# Altium PCB usb_hub.PcbDoc
Units mil, origin at the board's own origin, x right, y up, seen from the top; angles counter-clockwise.
Board outline 2795.28 x 1574.8 mil, 2 copper layers (Top Layer, Bottom Layer), stack 65.792 mil thick; 40 components, 27 nets, 133 pads, 14 vias.
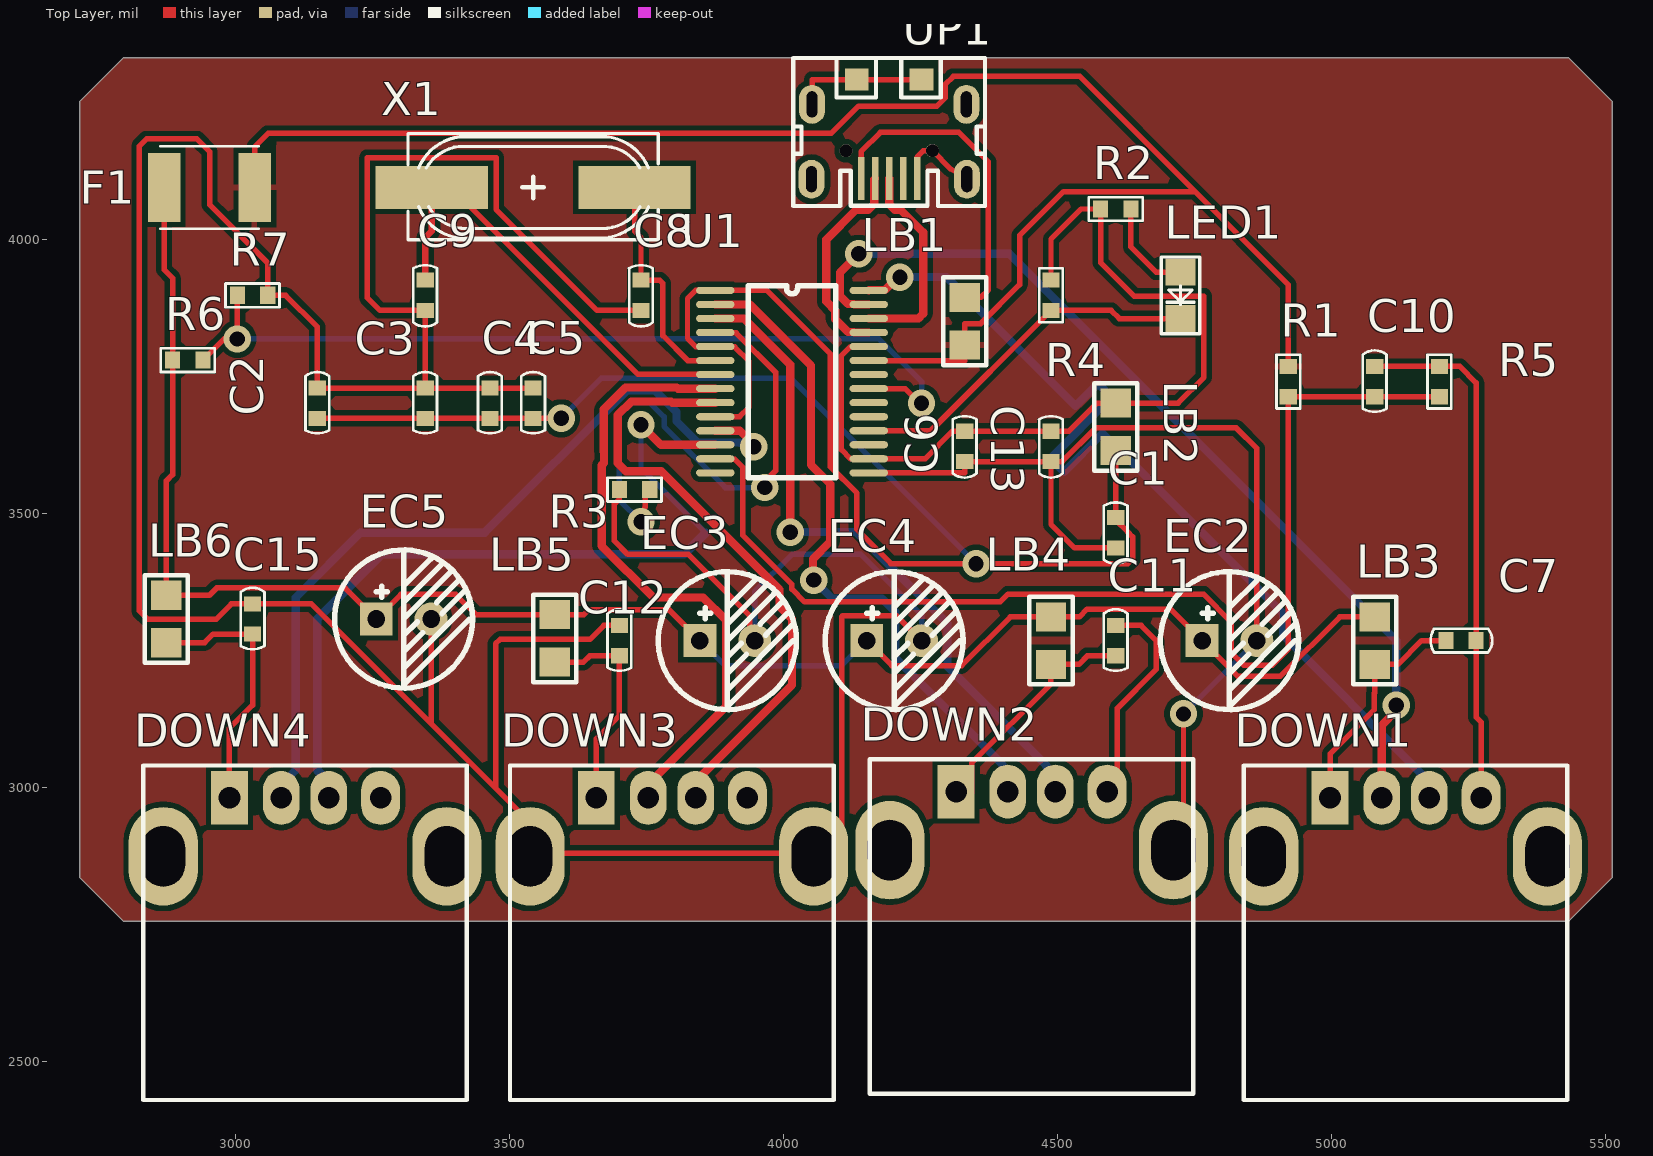
[diagram p0: Top Layer view]
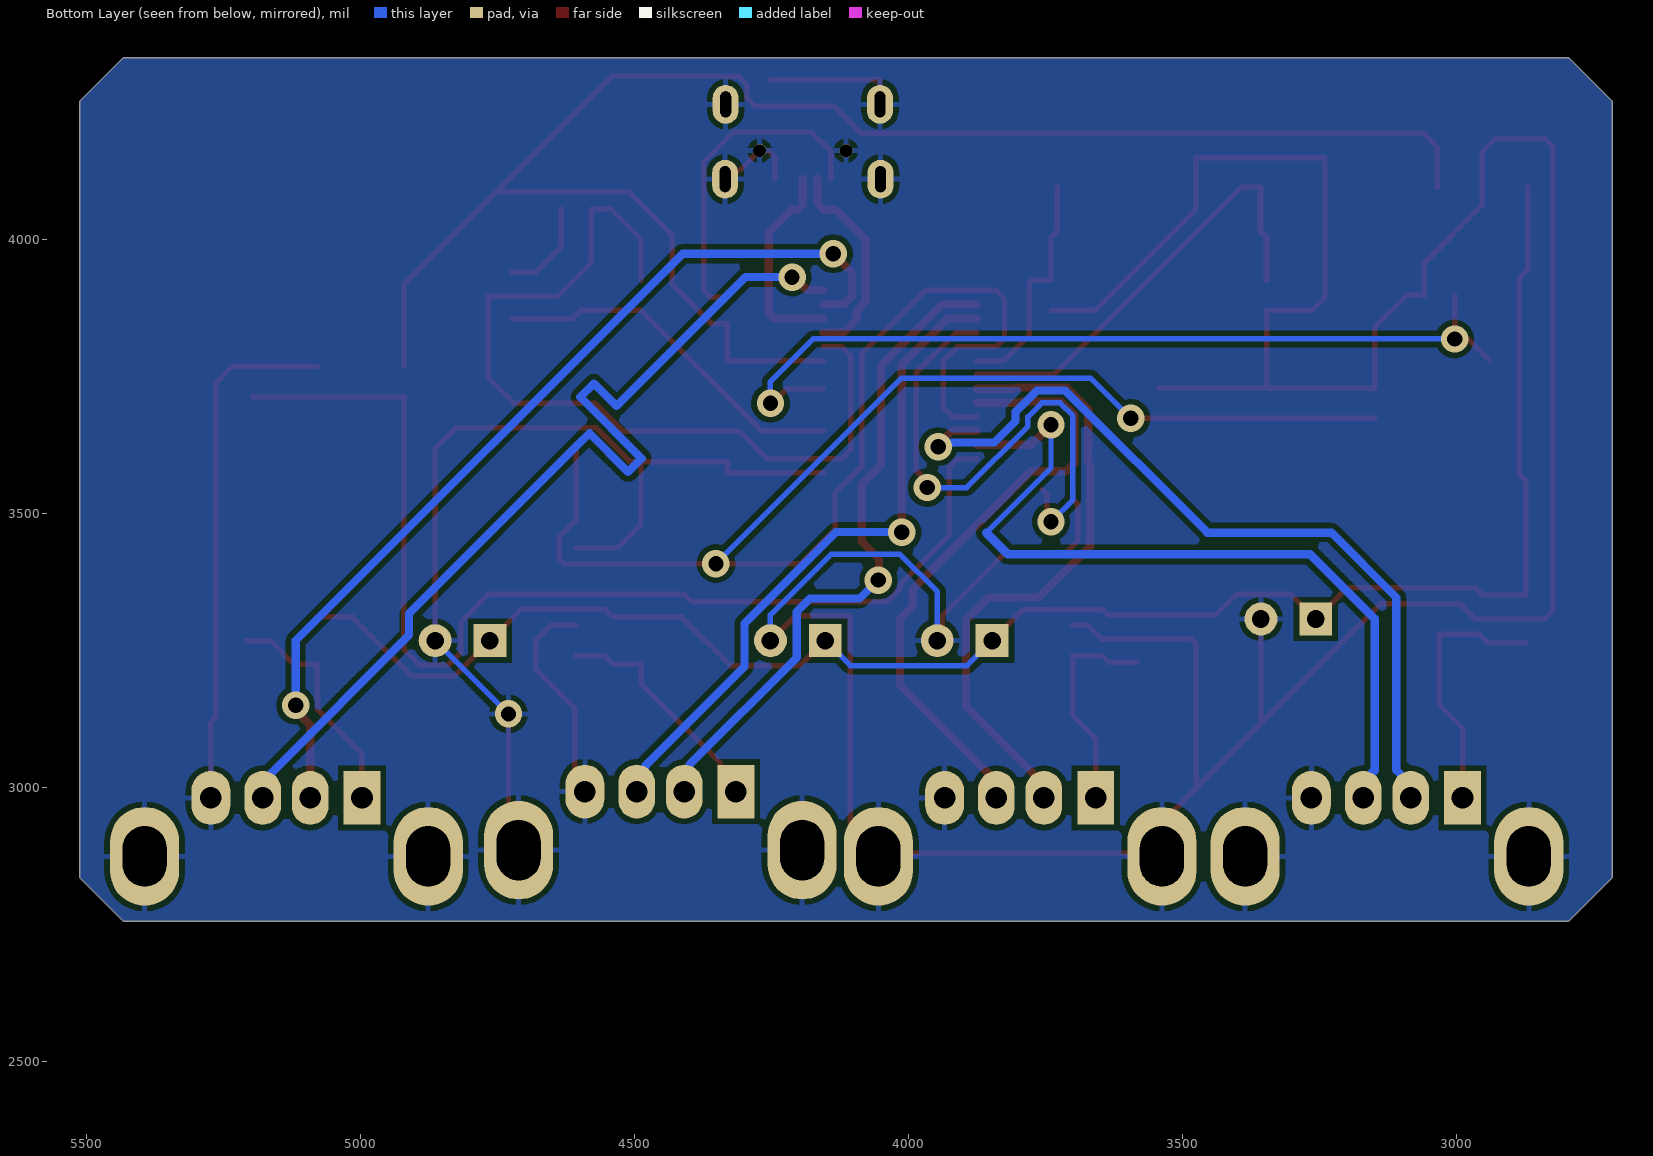
[diagram p1: Bottom Layer view, seen from below]

## Layer stack, top to bottom
Top Solder: solder mask 0.4, Solder Resist, Dk 3.5
Top Layer: signal copper 1.4
Dielectric 1: dielectric 62.992, FR-4, Dk 4.8
Bottom Layer: signal copper 1.4
Bottom Solder: solder mask 0.4, Solder Resist, Dk 3.5

## Board outline
2795.28,2755.91 2716.54,2834.65 2716.54,4251.97 2795.28,4330.71 5433.07,4330.71 5511.81,4251.97 5511.81,2834.65 5433.07,2755.91

## Design rules (kind name [scope] priority, off if disabled: settings)
AssemblyTestPointUsage [All] p1: isadvanced=TRUE
AssemblyTestpoint [All] p1: isadvanced=TRUE testpointundercomponent=TRUE minsize=40 maxsize=100 preferedsize=60 minholesize=0 maxholesize=40 preferedholesize=32 testpointgrid=1 usegrid=TRUE gridtolerance=0.01 allowsidetop=TRUE allowsidebottom=TRUE
Clearance Clearance_1 [OnMid vs OnMid] p1: gap=10 ignorepadtopadclearanceinfootprint=FALSE sourcerule=41 cellrowname=All cellrowtype=0 cellcolname=All cellcoltype=0 innerlayers=TRUE
Clearance Clearance_2 [(ExistsOnLayer('Top Layer') Or ExistsOnLayer('Bottom Layer')) vs (ExistsOnLayer('Top Layer') Or ExistsOnLayer('Bottom Layer'))] p2: gap=10 ignorepadtopadclearanceinfootprint=FALSE sourcerule=41 cellrowname=All cellrowtype=0 cellcolname=All cellcoltype=0 outerlayers=TRUE
Clearance [All] p3: gap=10 ignorepadtopadclearanceinfootprint=FALSE ismatrix=TRUE
ComponentClearance [All] p1: isadvanced=TRUE gap=10 collisioncheckmode=3 verticalgap=10 showdistances=FALSE
DiffPairsRouting [All] p1: maxlimit=10 minlimit=10 mostfreqgap=10 toplayer_minwidth=15 toplayer_maxwidth=15 toplayer_prefwidth=15 bottomlayer_minwidth=15 bottomlayer_maxwidth=15 bottomlayer_prefwidth=15 maxuncoupledlength=500
FabricationTestPointUsage [All] p1: isadvanced=TRUE valid=0 allowmultiple=FALSE
FabricationTestpoint [All] p1: isadvanced=TRUE side=3 testpointundercomponent=TRUE minsize=40 maxsize=100 preferedsize=60 minholesize=0 maxholesize=40 preferedholesize=32 testpointgrid=1 allowsidetop=TRUE allowsidebottom=TRUE usegrid=TRUE gridtolerance=0.01
FanoutControl Fanout_BGA [IsBGA] p1: isadvanced=TRUE bgadir=Out bgaviamode=Centered fanoutstyle=Auto fanoutdirection=Alternating viagrid=1 // Fanout_BGA (Default Rule)
FanoutControl Fanout_LCC [IsLCC] p2: isadvanced=TRUE bgadir=Out bgaviamode=Centered fanoutstyle=Auto fanoutdirection=Alternating viagrid=1 // Fanout_LCC (Default Rule)
FanoutControl Fanout_SOIC [IsSOIC] p3: isadvanced=TRUE bgadir=Out bgaviamode=Centered fanoutstyle=Auto fanoutdirection=Alternating viagrid=1 // Fanout_SOIC (Default Rule)
FanoutControl Fanout_Small [(CompPinCount < 5)] p4: isadvanced=TRUE bgadir=Out bgaviamode=Centered fanoutstyle=Auto fanoutdirection=OutThenIn viagrid=1 // Fanout_Small (Default Rule)
FanoutControl Fanout_Default [All] p5: isadvanced=TRUE bgadir=Out bgaviamode=Centered fanoutstyle=Auto fanoutdirection=Alternating viagrid=1 // Fanout_Default (Default Rule)
Height [All] p1: isadvanced=TRUE minheight=0 maxheight=1000 prefheight=500
HoleSize [All] p1: isadvanced=TRUE absolutevalues=TRUE maxlimit=150 minlimit=1 maxpercent=80.000 minpercent=20.000
HoleToHoleClearance [All] p1: isadvanced=TRUE gap=10 allowstackedmicrovias=TRUE
LayerPairs [All] p1: isadvanced=TRUE enforce=TRUE
MinimumSolderMaskSliver [All] p1: isadvanced=TRUE minsoldermaskwidth=2
NetAntennae [All] p1: isadvanced=TRUE netantennaetolerance=0
PasteMaskExpansion [All] p1: isadvanced=TRUE expansion=0
PlaneClearance [All] p1: isadvanced=TRUE clearance=20
PlaneConnect [All] p1: isadvanced=TRUE planeconnectstyle=Relief reliefexpansion=20 reliefentries=4 reliefconductorwidth=10 reliefairgap=10
PolygonConnect [All] p1: connectstyle=Relief reliefconductorwidth=10 reliefentries=4 polygonreliefangle="90 Angle" airgapwidth=10
RoutingCorners [All] p1: isadvanced=TRUE cornerstyle=45-Degree minsetback=100 maxsetback=100
RoutingPriority [All] p1: isadvanced=TRUE routingpriority=0
RoutingVias [All] p1: holewidth=28 width=50 viastyle="Through Hole" minholewidth=28 minwidth=50 maxholewidth=28 maxwidth=50
ShortCircuit [All] p1: isadvanced=TRUE allowed=FALSE
SilkToSilkClearance [All] p1: isadvanced=TRUE silktosilkclearance=0
SilkToSolderMaskClearance [IsPad] p1: isadvanced=TRUE minsilkscreentomaskgap=0 clearancetoexposedcopper=TRUE
SolderMaskExpansion [All] p1: isadvanced=TRUE expansion=0 istentingtop=FALSE
SupplyNets "Schematic Supply Nets_4" [InNet('GND')] p1: isadvanced=TRUE voltage=0.000
SupplyNets "Schematic Supply Nets_2" [InNet('VCC')] p2: isadvanced=TRUE voltage=0.000
SupplyNets "Schematic Supply Nets_1" [InNet('AVDD')] p3: isadvanced=TRUE voltage=0.000
SupplyNets "Schematic Supply Nets" [InNet('DVDD')] p4: isadvanced=TRUE voltage=0.000
UnRoutedNet [All] p1: isadvanced=TRUE
UnpouredPolygon [All] p1: isadvanced=TRUE
Width MaxMinWidth_1 [InNet('X2')] p1: maxlimit=15 minlimit=10 preferedwidth=14 minimp=50.000000 maximp=50.000000 favimp=50.000000
Width [All] p2: maxlimit=10 minlimit=10 preferedwidth=10
3 further rules are at their usual default settings.

## Classes and differential pairs
differential pair D_USB4: +USB4_P -USB4_N
differential pair D_USB3: +USB3_P -USB3_N
differential pair D_USB2: +USB2_P -USB2_N
differential pair D_USB1: +USB1_P -USB1_N
differential pair D_USB0: +USB0_P -USB0_N

## Components (designator, comment, footprint, x,y, rotation, side; value= is the part's Value field where it differs from the comment)
C1 "1uF" C0603 4606.3,3464.57 r90 top
C2 "0.1uF" C0603 3149.61,3700.79 r270 top
C3 "0.1uF" C0603 3346.46,3700.79 r270 top
C4 "0.1uF" C0603 3464.57,3700.79 r270 top
C5 "0.1uF" C0603 3543.31,3700.79 r270 top
C6 "0.1uF" C0603 4330.71,3622.05 r90 top
C7 "0.1uF" C0603 5236.22,3267.72 r180 top
C8 "20P" C0603 3740.16,3897.64 r90 top
C9 "20P" C0603 3346.46,3897.64 r90 top
C10 "0.1uF" C0603 5078.74,3740.16 r270 top
C11 "0.1uF" C0603 4606.3,3267.72 r270 top
C12 "0.1uF" C0603 3700.79,3267.72 r270 top
C13 "10uF" C0603 4488.19,3622.05 r90 top
C15 "0.1uF" C0603 3031.5,3307.09 r270 top
DOWN1 "USBA-A" USBA-A 5135.04,2980.71 r180 top
DOWN2 "USBA-A" USBA-A 4452.76,2992.13 r180 top
DOWN3 "USBA-A" USBA-A 3796.46,2980.71 r180 top
DOWN4 "USBA-A" USBA-A 3127.17,2980.71 r180 top
EC2 "100uF" CED-6_3-2_5 4813.78,3267.72 r0 top
EC3 "100uF" CED-6_3-2_5 3897.64,3267.72 r0 top
EC4 "100uF" CED-6_3-2_5 4201.97,3267.72 r0 top
EC5 "100uF" CED-6_3-2_5 3307.09,3307.09 r0 top
F1 "MF-MSMF125-2" FUSER_MF-MSMF125-2 2952.76,4094.49 r0 top
LB1 "FB" L0805 4330.71,3850.39 r90 top
LB2 "FB" L0805 4606.3,3657.48 r90 top
LB3 "FB" L0805 5078.74,3267.72 r270 top
LB4 "FB" L0805 4488.19,3267.72 r90 top
LB5 "FB" L0805 3582.68,3271.66 r90 top
LB6 "FB" L0805 2874.02,3307.09 r90 top
LED1 "PWR_LED" LED0805 4724.41,3897.64 r270 top
R1 "10K" R0603 4921.26,3740.16 r90 top
R2 "470R" R0603 4606.3,4055.12 r180 top
R3 "680R 1%" R0603 3728.46,3543.31 r0 top
R4 "100K" R0603 4488.19,3897.64 r90 top
R5 "47K" R0603 5196.85,3740.16 r270 top
R6 "10K" R0603 2913.39,3779.53 r180 top
R7 "20K" R0603 3031.5,3897.64 r180 top
U1 "GL850AUSB" SSOP28 4015.75,3740.16 r0 top
UP1 "SMD USB Micro" Micro_USB_MK5P 4192.91,4126.38 r0 top
X1 "12MHz" XTAL-49SMA-H4.2 3543.31,4094.49 r180 top

## Footprints (in the part's own frame and the unit in brackets; to place one, negate y for a bottom-side part, rotate by r counter-clockwise, add the part's x,y. Pads: shape width x height; smd on the part's side, far side on the other; paste and mask are expansions set on the pad)
C0603 [mm]
  rect 0.7x0.8 smd: 1(-0.703,0) 2(0.703,0)
  silkscreen extent -1.45,-0.55 1.4,0.55
CED-6_3-2_5 [mil]
  rect 60x60 hole 32: 1(-50,0)
  round 60 hole 32: 2(50,0)
  silkscreen extent -126,-126 126,126
FUSER_MF-MSMF125-2 [mm]
  rect 1.5x3.2 smd: 1(-2.1,0) 2(2.1,0)
  silkscreen extent -2.27,-1.91 2.27,1.91, body extent -2.27,-1.62 2.27,1.62, height 0.85
L0805 [mil]
  rect 53x55 smd: 1(-43.31,0) 2(43.31,0)
  silkscreen extent -80,-39 80,39
LED0805 [mil]
  rect 50x55 smd: 1(-42.5,0) 2(42.5,0)
  silkscreen extent -70,-35 70,35
Micro_USB_MK5P [mm]
  oval 1.2x1.8 hole 0.5 slot 1.2 at 90 deg: 0(-3.6,-0.43) 0(-3.575,3.04) 0(3.575,3.04) 0(3.6,-0.43)
  round 0.6 hole 0.6: 0(-2,0.89) 0(2,0.89)
  rect 1.1x1 smd: 0(-1.5,4.19) 0(1.5,4.19)
  rect 0.298x2 smd: 1(-1.3,-0.4) 2(-0.65,-0.4) 3(0,-0.4) 4(0.65,-0.4) 5(1.3,-0.4)
  silkscreen extent -4.45,-1.67 4.44,5.19
R0603 [mm]
  rect 0.7x0.8 smd: 1(-0.703,0) 2(0.703,0)
  silkscreen extent -1.25,-0.55 1.25,0.55
SSOP28 [mil]
  oval 70x13 smd: 1(-140,166.4) 2(-140,140.8) 3(-140,115.2) 4(-140,89.6) 5(-140,64) 6(-140,38.4) 7(-140,12.8) 8(-140,-12.8) 9(-140,-38.4) 10(-140,-64) 11(-140,-89.6) 12(-140,-115.2) 13(-140,-140.8) 14(-140,-166.4) 15(140,-166.4) 16(140,-140.8) 17(140,-115.2) 18(140,-89.6) 19(140,-64) 20(140,-38.4) 21(140,-12.8) 22(140,12.8) 23(140,38.4) 24(140,64) 25(140,89.6) 26(140,115.2) 27(140,140.8) 28(140,166.4)
  silkscreen extent -80,-175 80,175
USBA-A [mil]
  rect 67x98 hole 39.37: 1(137.8,0)
  oval 66.93x98.43 hole 39.37: 2(43.31,0) 3(-43.31,0)
  oval 70.87x98.43 hole 39.37: 4(-137.8,0)
  oval 125.98x180 hole 80 slot 110 at 90 deg: G1(-258.66,106.69) G2(258.66,106.69)
  silkscreen extent -295,-59 295,551
XTAL-49SMA-H4.2 [mm]
  rect 5.2x2 smd: 1(-4.7,0) 2(4.7,0)
  silkscreen extent -5.8,-2.5 5.8,2.42

## Part data
C1 C2 C3 C4 C5 C6 C7 C8 C9 C10 C11 C12 C13 C15: library part C-0603
EC2 EC3 EC4 EC5: library part CE-100UF/16V
F1: "Polymeric PTC Resettable Fuse 6V 1.25 A Ih Surface Mount 1812 (4532 Metric), Concave", Package="1812 Bourns", Availability="In Stock", Check_prices=https://www.snapeda.com/parts/MF-MSMF125-2/Bourns/view-part/?ref=eda, MF=Bourns, MP=MF-MSMF125-2, Price=None, Purchase-URL=https://pricing.snapeda.com/search/part/MF-MSMF125-2/?ref=eda, SnapEDA_Link=https://www.snapeda.com/parts/MF-MSMF125-2/Bourns/view-part/?ref=snap
LB1 LB2 LB3 LB4 LB5 LB6: library part FB-0805
LED1: library part LED-3mm_0
R1 R2 R4 R5 R6 R7: library part R-0603
  R1 R6: Parameter 1=10K
  R2: Parameter 1=470R
  R4: Parameter 1=100K
  R5: Parameter 1=47K
  R7: Parameter 1=20K
R3: library part "R-0603 1%", Parameter 1=680R
U1: library part GLI8024-48_3
UP1: library part CNS-USBminiAB-A
X1: library part XD-49US-A

## Via types
v1: diameter 50, hole 28, Top Layer to Bottom Layer, 14 vias

## Nets (pads, with @x,y where several pads share a name; then routed paths per layer and width w, separated by ;. In a path a pad name is that pad's centre, name@x,y a point inside that pad or via, vN(x,y) a via of type N, cw(c..) or ccw(c..) an arc to the next point about the centre after c; other vN are vias at no path point)
AVDD: C1.2 C2.2 C3.2 C4.2 C5.2 LB2.1 U1.1 U1.5 U1.10 | length 3124.6
  Top Layer w10: C2.2 3248,3673.12 C3.2 3444,3673.12 C4.2 C5.2 v1(3594.38,3673.12) ; U1.10 3920.16,3676.16 3937.01,3693.01 3937.01,3777.6 3911.02,3803.58 3876.32,3803.58 U1.5 3840,3804.16 3825,3819.16 3825,3891.56 3840,3906.56 U1.1 3970,3906.56 4085.75,3790.81 4085.75,3584.85 4133.86,3536.74 4133.86,3470.42 4196.16,3408.12 v1(4351.46,3408.12) 4628.26,3408.12 4637.05,3416.91 4637.05,3456.89 4628.26,3465.68 4606.3,3487.64 C1.2 LB2.1
  Bottom Layer w10: v1(3594.38,3673.12) 3667.68,3746.42 4013.16,3746.42 v1(4351.46,3408.12)
DVDD: C6.2 C13.2 LB2.2 R2.2 R4.2 U1.16 U1.24 | length 1605.7
  Top Layer w10: U1.24 4122.44,3804.16 4105.75,3787.46 4105.75,3616.05 4122.44,3599.36 U1.16 4258.36,3599.36 4308.72,3649.72 C6.2 4409,3649.72 C13.2 4521,3649.72 4572.07,3700.79 LB2.2 4720,3700.79 4767,3747.79 4767,3896 4640,3896 4578.63,3957.37 R2.2 4543.31,4055.12 4488.19,4000 R4.2
GND: C1.1 C2.1 C3.1 C4.1 C5.1 C6.1 C7.1 C8.1 C9.1 C10.1 C11.1 C12.1 C13.1 C15.1 DOWN1.4 DOWN1.G1 DOWN1.G2 DOWN2.4 DOWN2.G1 DOWN2.G2 DOWN3.4 DOWN3.G1 DOWN3.G2 DOWN4.4 DOWN4.G1 DOWN4.G2 EC2.2 EC3.2 EC4.2 EC5.2 R3.1 R5.1 R7.1 U1.15 UP1.0 UP1.5 | length 10398.1
  Top Layer w10: EC5.2 3357.09,3116.67 ; C5.1 C4.1 3444,3728.46 C3.1 ; C12.1 3672.38,3295.38 3647,3270 3483,3270 3475,3262 3475,2998.76 ; R3.1 3700.79,3526 3691,3516.21 3691,3450 3716,3425 3826.64,3425 3938.93,3312.72 3938.93,3276.43 EC3.2 ; C8.1 3660.03,3869.97 3475.63,4054.37 3475.63,4148.86 3240.9,4148.86 3240.9,3893.07 3264,3869.97 C9.1 C3.1 ; UP1.0@4052.17,4246.06 4052.17,4291.34 4133.86,4291.34 UP1.0@4251.97,4291.34 ; U1.15 4330.71,3573.76 C6.1 4409,3594.38 C13.1 ; UP1.5 4244.09,4150 4255.51,4161.42 4271.65,4161.42 4304.68,4128.39 4334.65,4111.18 UP1.0@4334.65,4109.45 ; EC4.2 4206.68,3313 4108,3313 4106,3311 4106,2920 4066,2880 4055.12,2880 3593.76,2880 3568.77,2904.99 3475,2998.76 ; C11.1 4652.61,3295.39 4680,3268 4680,3215 4609.06,3144.06 DOWN2.4@4609.06,2980.71 ; C1.1 4531.1,3436.9 4488.19,3479.81 C13.1 ; DOWN2.G1@4729.92,2874.02 v1(4729.92,3133.85) ; EC2.2 4863.78,3618.22 4826,3656 4570,3656 4508.38,3594.38 C13.1 ; C10.1 R5.1 5234,3767.83 5263.89,3737.94 C7.1 5263.89,3127.95 5272.84,3119 DOWN1.4 ; C3.1 3248,3728.46 C2.1 3149.61,3840 3091.97,3897.64 R7.1 3059.17,3956.83 2953,4063 2953,4160 2930,4183 2838,4183 2825,4170 2825,3322 2840,3307 2965.24,3307 2993,3334.76 C15.1 3139,3334.76 3357.09,3116.67 ; 3357.09,3116.67 3475,2998.76
  Bottom Layer w10: EC3.2 3947.64,3357.09 4015.75,3425.2 4141.41,3425.2 4251.97,3314.64 EC4.2 ; v1(4729.92,3133.85) EC2.2
NetC7_2: C7.2 DOWN1.1 LB3.2 | length 425.2
  Top Layer w10: DOWN1.1 4997.24,3061 5078.11,3141.87 5078.11,3172.07 5078.74,3172.7 LB3.2 5121,3224.41 5164.31,3267.72 C7.2
NetC11_2: C11.2 DOWN2.1 LB4.1 | length 432.4
  Top Layer w10: DOWN2.1@4333.46,2980.71 4343.46,2990.71 4343.46,3044.25 4487.98,3188.77 4487.98,3224.2 LB4.1 4539,3224.41 4554.64,3240.05 C11.2
NetLB1_2: LB1.2 UP1.1 | length 600.9
  Top Layer w10: UP1.1 4141.73,4160 4176.73,4195 4320,4195 4374,4141 4374,3907.7 4360,3893.7 LB1.2
NetLED1_1: LED1.1 R2.1 | length 178.5
  Top Layer w10: R2.1 4633.97,3986.17 4680,3940.14 LED1.1
OVCUR1#: R6.1 R7.2 U1.21 | length 1561
  Top Layer w10: R6.1 v1@2979.53,3818 ; v1(3003.83,3818) R7.2 ; U1.21 4221.97,3727.36 4248.54,3700.79 v1(4251.97,3700.79)
  Bottom Layer w10: v1(3003.83,3818) 4174.13,3818 4251.97,3740.16 v1(4251.97,3700.79)
PGANG: LED1.2 R4.1 U1.18 | length 665.7
  Top Layer w10: U1.18 4268.78,3650.56 R4.1 4598,3869.97 4612.83,3855.14 LED1.2
RESET#: C10.2 R1.1 R5.2 U1.13 | length 2072.1
  Top Layer w10: U1.13 3876.32,3598.78 3910.85,3598.78 3926,3583.63 3926,3459.53 4015.35,3370.18 4015.35,3361.58 4038.78,3338.15 4395.44,3338.15 4409.82,3352.53 4766.47,3352.53 4817,3302 4817,3245.72 4840,3222.72 4891.5,3222.72 4921.26,3252.48 R1.1 C10.2 R5.2
RREF: R3.2 U1.4 | length 981.4
  Top Layer w10: v1(3740.16,3484.57) 3748.15,3512.56 3748.15,3535.33 R3.2 ; U1.4 3876.32,3829.18 3913.7,3829.18 3986,3756.89 3986,3577.8 3966,3557.8 v1(3966,3546.98)
  Bottom Layer w10: v1(3740.16,3484.57) 3700.16,3524.57 3700.16,3677.99 3723.59,3701.42 3756.73,3701.42 3782.38,3675.76 3782.38,3658.52 3893.92,3546.98 v1(3966,3546.98)
USB0_N: U1.25 UP1.2 | length 384.6
  Top Layer w15: U1.25 4129.25,3829.76 4128.25,3830.76 4117.84,3830.76 4094.49,3854.11 4094.49,3870.02 4078.25,3886.26 4078.25,3999.51 4132.5,4053.76 4154.85,4053.76 4165.7,4064.6 4165.7,4109 UP1.2
USB0_P: U1.26 UP1.3 | length 381.6
  Top Layer w15: U1.26 4246.31,3855.36 4255.1,3864.14 4255.1,4012.62 4213.96,4053.76 4203.06,4053.76 4192.91,4063.9 UP1.3
USB1_N: DOWN1.2 U1.27 | length 1720.9
  Top Layer w15: v1(4137.23,3973.38) 4103.25,3939.4 4103.25,3896.62 4117.91,3881.96 4128.25,3881.96 4129.25,3880.96 U1.27 ; DOWN1.2 5091.73,3113.76 5118.11,3140.14 v1(5118.11,3149.61)
  Bottom Layer w15: v1(4137.23,3973.38) 4412.45,3973.38 5118.11,3267.72 v1(5118.11,3149.61)
USB1_P: DOWN1.3 U1.28 | length 1783.9
  Top Layer w15: U1.28 4156.75,3907.56 4185,3907.56 4208.32,3930.88 v1(4212.6,3930.88)
  Bottom Layer w15: v1(4212.6,3930.88) 4297.47,3930.88 4527.56,3700.79 4532.86,3695.48 4574.24,3736.86 4598.99,3712.11 4486.9,3600.02 4511.65,3575.28 4582.36,3645.99 4603.93,3624.42 4911.28,3317.07 4911.28,3277.7 5160.86,3028.11 5160.86,3028 5178.35,3010.51 DOWN1.3
USB2_N: DOWN2.2 U1.2 | length 1245.3
  Top Layer w15: U1.2 3938.85,3880.96 4050.41,3769.4 4050.41,3588.37 4085.43,3553.35 4085.43,3448.29 4053.91,3416.77 4053.91,3379.6 v1(4055.35,3378.15)
  Bottom Layer w15: v1(4055.35,3378.15) 4089.1,3344.41 4180,3344.41 4203.92,3320.48 4203.92,3237.02 4399.51,3041.43 4399.51,3009.14 DOWN2.2@4427.95,2980.71
USB2_P: DOWN2.3 U1.3 | length 1222.3
  Top Layer w15: U1.3 3928.25,3855.36 4012.33,3771.28 v1(4012.33,3465.05)
  Bottom Layer w15: v1(4012.33,3465.05) 4012.94,3465.66 4132.76,3465.66 4299.47,3298.96 4299.47,3220.22 4479.37,3040.32 4479.37,3038.63 4496.07,3021.93 DOWN2.3
USB3_N: DOWN3.2 U1.8 | length 1138
  Top Layer w15: DOWN3.2 3753.15,3005.12 3895.14,3147.11 3895.14,3304.96 3853.65,3346.46 3762.72,3346.46 3668.5,3440.68 3668.5,3587.72 3672.66,3591.87 3672.66,3612.33 3672.06,3612.93 3672.06,3689.63 3711.95,3729.52 3805.57,3729.52 3807.73,3727.36 U1.8
USB3_P: DOWN3.3 U1.9 | length 1129.9
  Top Layer w15: DOWN3.3 3839.77,3010.51 4015.75,3186.49 4015.75,3307.09 3992.85,3329.98 3992.85,3360.86 3777.16,3576.56 3712.97,3576.56 3697.66,3591.87 3697.66,3679.02 3722.55,3703.92 3794.97,3703.92 3797.12,3701.76 U1.9
USB4_N: DOWN4.2 U1.11 | length 1505.7
  Top Layer w15: U1.11 3920.39,3650.56 3946,3624.95 v1(3946,3621.42)
  Bottom Layer w15: DOWN4.2 3083.86,3004.83 3110.24,3031.21 3110.24,3346.46 3228.35,3464.57 3454.92,3464.57 3714.27,3723.92 3766.05,3723.92 3804.88,3685.08 3804.88,3667.84 3843.72,3629 3919.71,3629 3920.6,3628.11 3939.3,3628.11 v1(3946,3621.42)
USB4_P: DOWN4.3 U1.12 | length 1505.4
  Top Layer w15: v1(3740.16,3661.42) 3776.62,3624.96 U1.12
  Bottom Layer w10: v1(3740.16,3661.42) 3740.16,3582.68 3858.27,3464.57
  Bottom Layer w16.09: DOWN4.3 3170.48,3010.21 3149.61,3031.08 3149.61,3307.09 3267.72,3425.2 3818.9,3425.2 3858.27,3464.57
VCC: F1.2 LB1.1 R1.2 U1.23 | length 3148.7
  Top Layer w10: F1.2 3035.43,4168.43 3060,4193 4087,4193 4137,4243 4280,4243 4295,4258 4295,4282 4310,4297 4541,4297 4751,4087 ; U1.23 4330.71,3778.56 LB1.1 4330.71,3846 4360,3846 4431,3917 4431,4007 4511,4087 4751,4087 ; R1.2 4921.26,3916.74 4751,4087
VDP: EC2.1 EC3.1 EC4.1 EC5.1 F1.1 LB3.1 LB4.2 LB5.2 LB6.2 R6.2 | length 3245.5
  Top Layer w10: F1.1 2870.08,3944.64 2885.71,3929 R6.2 2885.71,3570.7 2874.01,3559 LB6.2 2952.52,3350.4 2966.12,3364 3200.17,3364 EC5.1 3302.09,3352.09 3402.09,3352.09 3439.21,3314.97 LB5.2 3635.97,3314.97 3645.16,3324.16 3722.75,3324.16 3722.96,3323.96 3791.4,3323.96 EC3.1 ; EC4.1 4197.68,3222 4325,3222 4414.03,3311.03 LB4.2 4540.03,3311.03 4554,3325 4706.5,3325 EC2.1 4828.78,3202.72 4906.72,3202.72 5015.03,3311.03 LB3.1
  Bottom Layer w10: EC3.1 3893.35,3222 4106.25,3222 EC4.1
VDP_F2: C12.2 DOWN3.1 LB5.1 | length 399.7
  Top Layer w10: LB5.1 3635,3228.35 3646.7,3240.05 C12.2 3700.79,3131.13 3658.66,3089 DOWN3.1
VDP_F3: C15.2 DOWN4.1 LB6.1 | length 480.1
  Top Layer w10: LB6.1 2944,3263.78 2959.64,3279.42 C15.2 3031.5,3150.13 2989.37,3108 DOWN4.1
X1: C8.2 U1.6 X1.1 | length 426.4
  Top Layer w10: X1.1 3728.35,4014.81 3740.16,4003 C8.2 3774.14,3925.31 3780,3919.45 3780,3824 3825.44,3778.56 U1.6
X2: C9.2 U1.7 X1.2 | length 833
  Top Layer w10: X1.2 3393.51,4094.49 3734.64,3753.36 3875.35,3753.36 U1.7
  Top Layer w12: C9.2 3346.46,4003 3358.27,4014.81 X1.2
pads on no net: U1.14 U1.17 U1.19 U1.20 U1.22 UP1.4

## Polygon pours and split planes (outlines as drawn)
GND on Bottom Layer "GND_L02_P001" (solid, pour order 1): 2795.28,4330.71 5433.07,4330.71 5511.81,4251.97 5511.81,2834.65 5433.07,2755.91 2795.28,2755.91 2716.54,2834.65 2716.54,4251.97
VCC on Top Layer "VCC_L01_P000" (solid, pour order 0): 2795.28,4330.71 5433.07,4330.71 5511.81,4251.97 5511.81,2834.65 5433.07,2755.91 2795.28,2755.91 2716.54,2834.65 2716.54,4251.97